# Altium PCB SAMPLE.PcbDoc
Units mil, origin at the board's own origin, x right, y up, seen from the top; angles counter-clockwise.
Board outline 3287.17 x 3789.32 mil, 2 copper layers (Top Layer, Bottom Layer); 11 components, 9 nets, 30 pads, 0 vias.
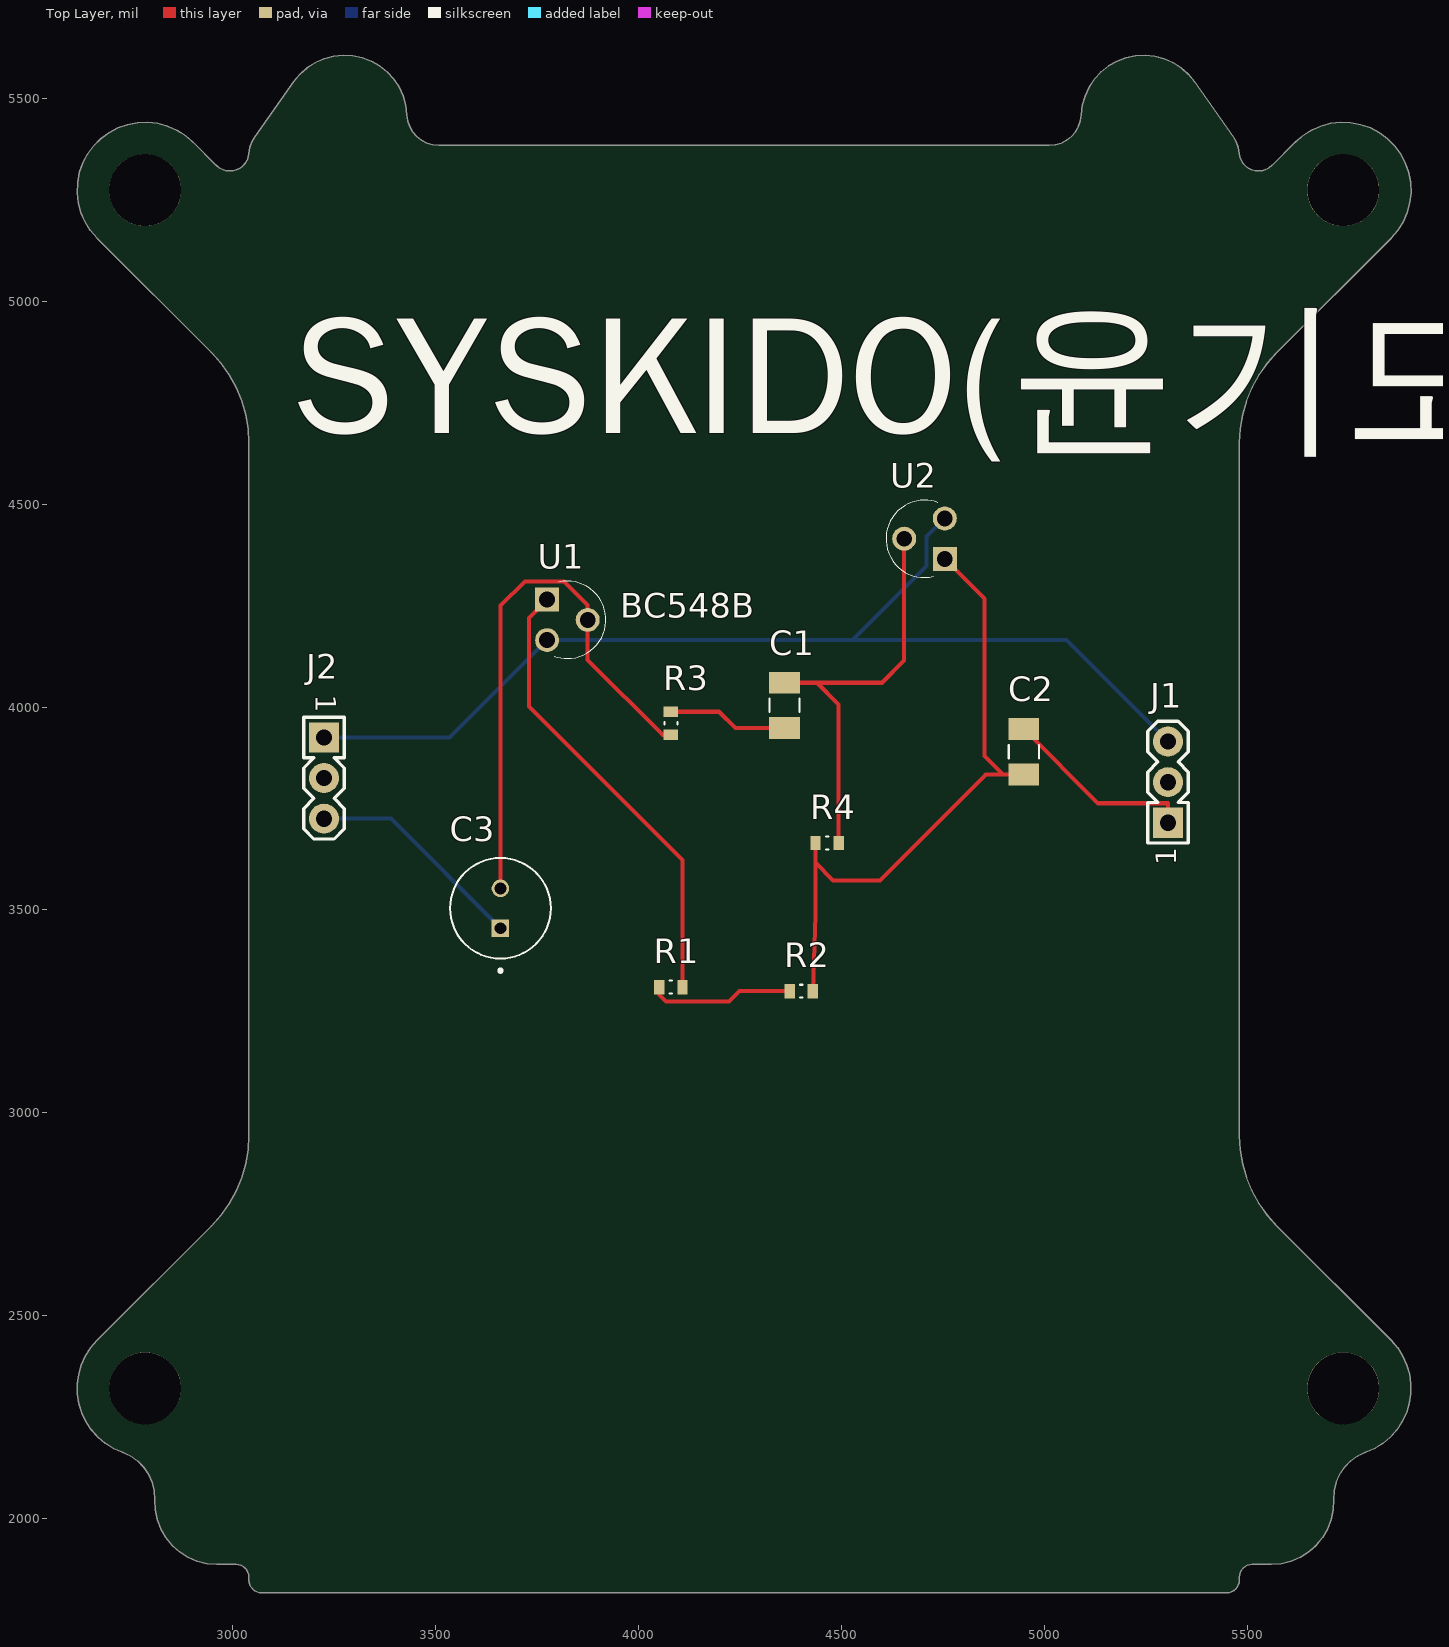
[diagram p0: Top Layer view]
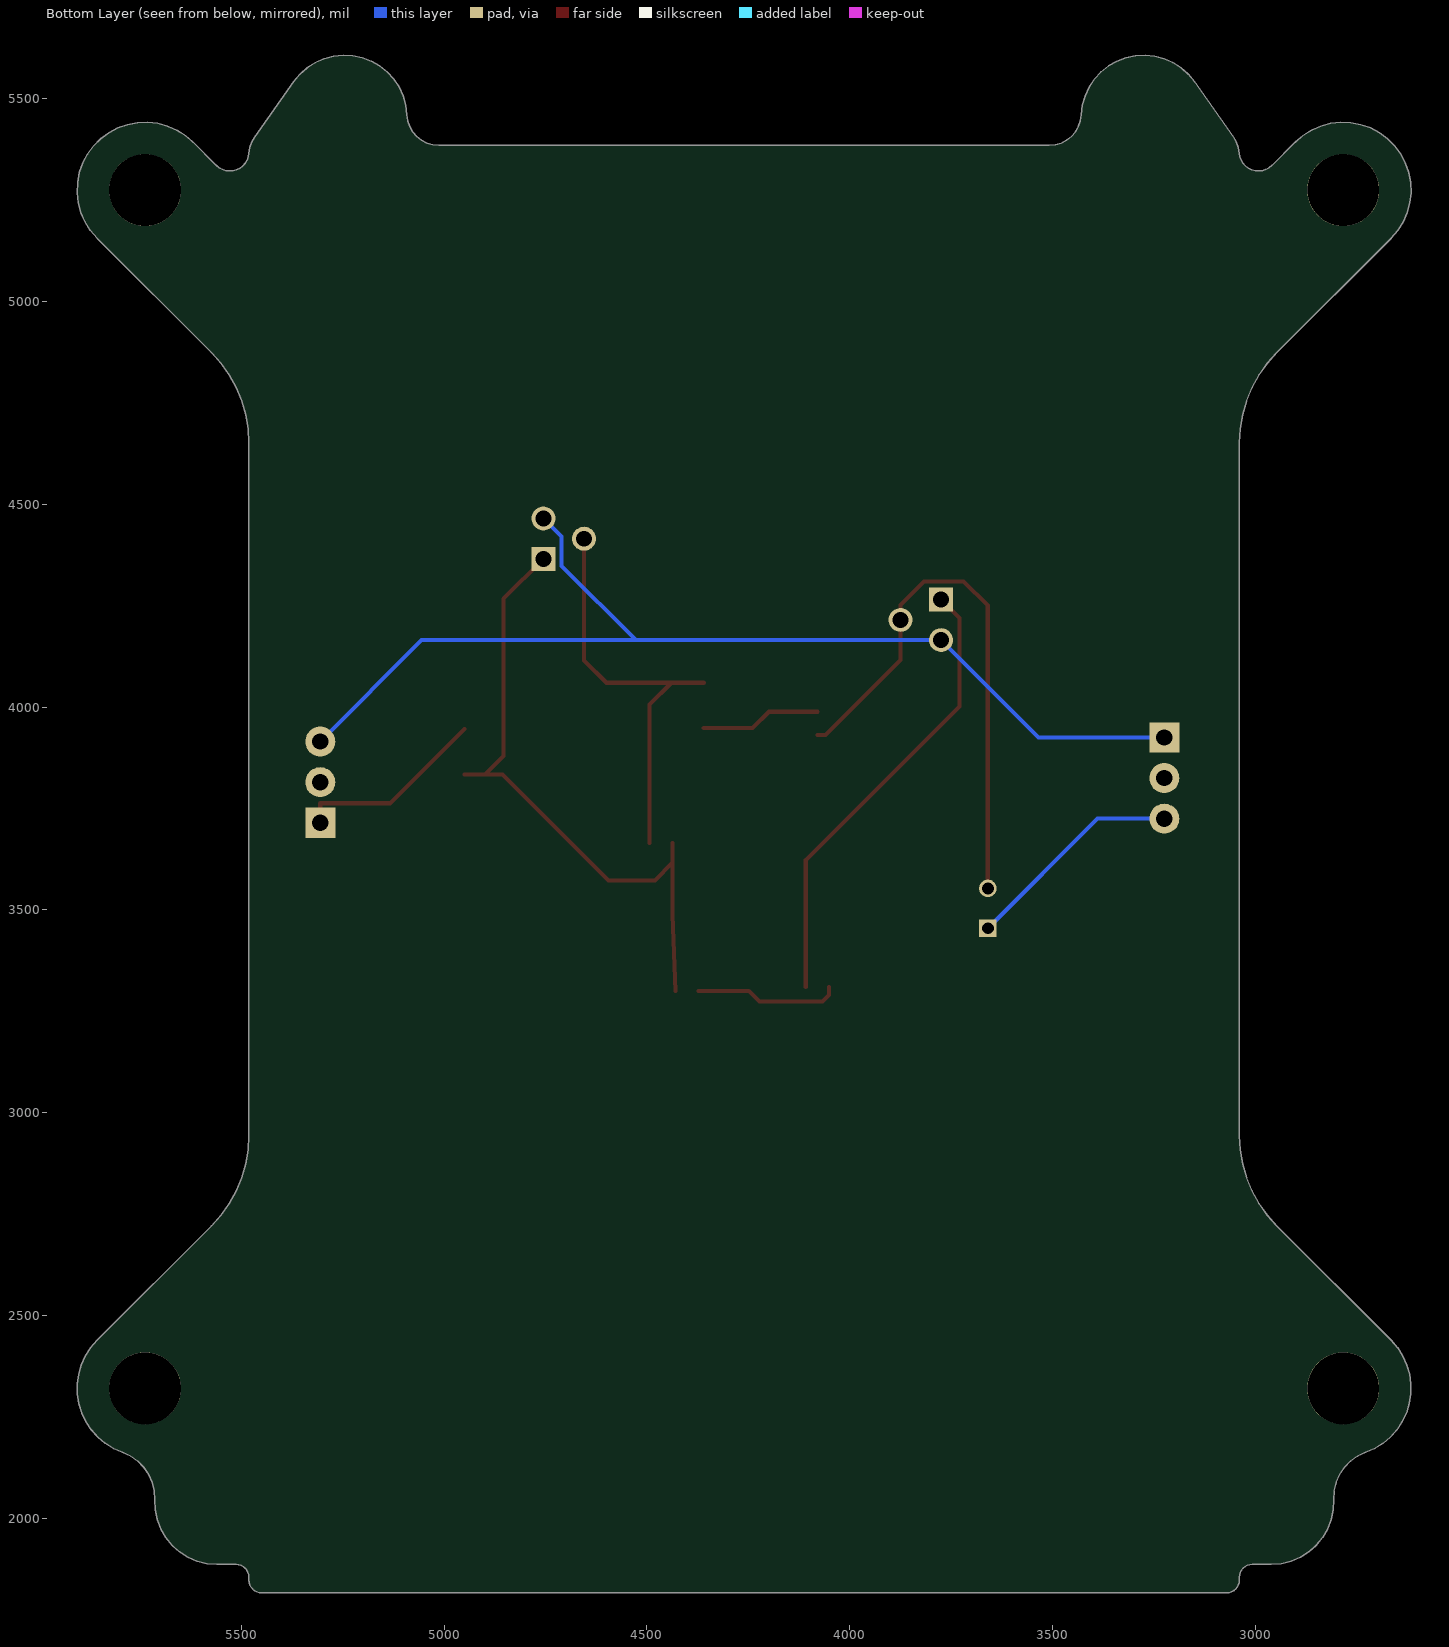
[diagram p1: Bottom Layer view, seen from below]

## Layer stack, top to bottom
Top Solder: solder mask 0.4, Solder Resist, Dk 3.5
Top Layer: signal copper 1.4
Dielectric 1: dielectric 12.6, FR-4, Dk 4.8
Bottom Layer: signal copper 1.4
Bottom Solder: solder mask 0.4, Solder Resist, Dk 3.5

## Board outline
5561.26,5335 5618.54,5392.27 5637.49,5408.58 5658.67,5421.89 5681.59,5431.89 5705.74,5438.36 5730.59,5441.16 5755.58,5440.23 5780.16,5435.58 5803.76,5427.32 5825.87,5415.63 5845.99,5400.78 5863.68,5383.1 5878.53,5362.98 5890.21,5340.87 5898.47,5317.26 5903.12,5292.69 5904.06,5267.7 5901.26,5242.85 5894.78,5218.69 5884.78,5195.77 5871.48,5174.6 5855.17,5155.64 5573.2,4873.67 5549.66,4847.33 5529.22,4818.53 5512.14,4787.62 5498.62,4754.99 5488.84,4721.05 5482.93,4686.22 5480.94,4650.96 5480.94,2944.2 5482.93,2908.93 5488.84,2874.11 5498.62,2840.17 5512.14,2807.54 5529.22,2776.63 5549.66,2747.82 5573.2,2721.49 5855.17,2439.52 5870.95,2421.28 5883.94,2400.96 5893.88,2378.99 5900.55,2355.81 5903.83,2331.92 5903.64,2307.8 5899.98,2283.97 5892.93,2260.9 5882.64,2239.09 5869.32,2218.99 5853.25,2201 5834.76,2185.52 5814.24,2172.85 5792.11,2163.27 5772.57,2154.36 5754.97,2142.07 5739.88,2126.79 5727.81,2109.03 5719.15,2089.38 5714.2,2068.49 5713.1,2047.05 5712.11,2022.36 5707.16,1998.15 5698.4,1975.05 5686.04,1953.65 5670.41,1934.51 5651.92,1918.13 5631.03,1904.93 5608.3,1895.24 5584.31,1889.33 5559.69,1887.34 5512.44,1887.34 5506.3,1886.74 5500.39,1884.95 5494.94,1882.03 5490.17,1878.12 5486.25,1873.34 5483.34,1867.9 5481.55,1861.99 5480.94,1855.85 5480.94,1848.76 5480.34,1842.62 5478.55,1836.71 5475.64,1831.26 5471.72,1826.49 5466.95,1822.57 5461.5,1819.66 5455.59,1817.87 5449.45,1817.26 3071.5,1817.26 3065.35,1817.87 3059.44,1819.66 3054,1822.57 3049.23,1826.49 3045.31,1831.26 3042.4,1836.71 3040.61,1842.62 3040,1848.76 3040,1855.85 3039.39,1861.99 3037.6,1867.9 3034.69,1873.34 3030.78,1878.12 3026,1882.03 3020.56,1884.95 3014.65,1886.74 3008.5,1887.34 2961.26,1887.34 2936.63,1889.33 2912.64,1895.24 2889.91,1904.93 2869.03,1918.13 2850.53,1934.51 2834.9,1953.65 2822.55,1975.05 2813.78,1998.15 2808.84,2022.36 2807.84,2047.05 2806.75,2068.49 2801.79,2089.38 2793.13,2109.03 2781.06,2126.79 2765.98,2142.07 2748.37,2154.36 2728.83,2163.27 2706.7,2172.85 2686.18,2185.52 2667.69,2201 2651.62,2218.99 2638.3,2239.09 2628.01,2260.9 2620.97,2283.97 2617.31,2307.8 2617.12,2331.92 2620.39,2355.81 2627.07,2378.99 2637.01,2400.96 2650,2421.28 2665.78,2439.52 2947.75,2721.49 2971.29,2747.82 2991.72,2776.63 3008.81,2807.54 3022.33,2840.17 3032.1,2874.11 3038.02,2908.93 3040,2944.2 3040,4650.96 3038.02,4686.22 3032.1,4721.05 3022.33,4754.99 3008.81,4787.62 2991.72,4818.53 2971.29,4847.33 2947.75,4873.67 2665.78,5155.64 2649.47,5174.6 2636.16,5195.77 2626.16,5218.69 2619.69,5242.85 2616.89,5267.7 2617.82,5292.69 2622.47,5317.26 2630.73,5340.87 2642.42,5362.98 2657.27,5383.1 2674.95,5400.78 2695.07,5415.63 2717.18,5427.32 2740.79,5435.58 2765.36,5440.23 2790.35,5441.16 2815.2,5438.36 2839.36,5431.89 2862.28,5421.89 2883.45,5408.58 2902.41,5392.27 2959.68,5335 2966.6,5329.28 2974.48,5324.98 2983.03,5322.25 2991.94,5321.18 3000.9,5321.81 3009.57,5324.13 3017.65,5328.05 3024.84,5333.42 3030.88,5340.06 3035.56,5347.72 3038.71,5356.13 3040.21,5364.98 3042.5,5378.96 3047.27,5392.3 3054.34,5404.58 3150.65,5541.45 3165.83,5559.82 3183.68,5575.61 3203.75,5588.46 3225.58,5598.04 3248.62,5604.13 3272.32,5606.58 3296.13,5605.34 3319.45,5600.42 3341.73,5591.96 3362.43,5580.15 3381.05,5565.28 3397.15,5547.7 3410.34,5527.85 3420.29,5506.19 3426.77,5483.26 3429.63,5459.6 3431.69,5444.72 3436.54,5430.5 3444.01,5417.47 3453.81,5406.09 3465.6,5396.78 3478.94,5389.87 3493.34,5385.63 3508.3,5384.19 5012.65,5384.19 5027.6,5385.63 5042.01,5389.87 5055.35,5396.78 5067.14,5406.09 5076.94,5417.47 5084.4,5430.5 5089.25,5444.72 5091.32,5459.6 5094.17,5483.26 5100.66,5506.19 5110.61,5527.85 5123.79,5547.7 5139.89,5565.28 5158.52,5580.15 5179.22,5591.96 5201.5,5600.42 5224.82,5605.34 5248.62,5606.58 5272.33,5604.13 5295.37,5598.04 5317.19,5588.46 5337.27,5575.61 5355.11,5559.82 5370.3,5541.45 5466.6,5404.58 5473.68,5392.3 5478.44,5378.96 5480.74,5364.98 5482.24,5356.13 5485.38,5347.72 5490.06,5340.06 5496.11,5333.42 5503.3,5328.05 5511.37,5324.13 5520.05,5321.81 5529,5321.18 5537.91,5322.25 5546.46,5324.98 5554.34,5329.28

## Design rules (kind name [scope] priority, off if disabled: settings)
Clearance [All] p1: gap=10 ignorepadtopadclearanceinfootprint=FALSE
PolygonConnect [All] p1: connectstyle=Relief reliefconductorwidth=10 reliefentries=4 polygonreliefangle="90 Angle" airgapwidth=10
RoutingVias [All] p1: holewidth=28 width=50 viastyle="Through Hole" minholewidth=28 minwidth=50 maxholewidth=28 maxwidth=50
SolderMaskExpansion [All] p1: expansion=4 istentingtop=FALSE
Width [All] p1: maxlimit=10 minlimit=10 preferedwidth=10
30 further rules are at their usual default settings.

## Classes and differential pairs
component class SAMPLE: " " C1 C2 J2 R1 R2 R3 U2

## Components (designator, comment, footprint, x,y, rotation, side; value= is the part's Value field where it differs from the comment)
C1 "GRM31CR60J227ME11L" CAPC3216X190N 4360,4004.06 r90 top
C2 "GRM31CR60J227ME11L" CAPC3216X190N 4950,3890 r90 top
C3 "ECA1HM470" CAPPRD250W50D630H1120 3660,3504.21 r90 top
J1 "22-28-4033" 1X03-PIN 5305,3715 r90 top
J2 "22-28-4033" 1X03-PIN 3225,3925 r270 top
R1 "ERA3AEB301V" RES_ERA3AEB301V 4080,3310 r180 top
R2 "ERA3AEB301V" RES_ERA3AEB301V 4401.46,3300 r180 top
R3 "ERA3AEB301V" RES_ERA3AEB301V 4080,3960 r90 top
R4 "ERA3AEB301V" RES_ERA3AEB301V 4465,3665 r180 top
U1 "BC548B" TO127P254X732-3 3875,4165 r270 top
U2 "BC548B" TO127P254X732-3 4655,4465 r90 top

## Footprints (in the part's own frame and the unit in brackets; to place one, negate y for a bottom-side part, rotate by r counter-clockwise, add the part's x,y. Pads: shape width x height; smd on the part's side, far side on the other; paste and mask are expansions set on the pad)
1X03-PIN [mil]
  rect 74x74 / inner round 74 / far side rect 74x74 hole 40: 1(0,0)
  round 74 hole 40: 2(100,0) 3(200,0)
  silkscreen extent -50,-50 250,50
CAPC3216X190N [mm]
  rect 1.37x1.91 smd: 1(-1.421,0) 2(1.421,0)
  silkscreen extent -0.42,-0.95 0.42,0.95, body extent -1.6,-0.8 1.6,0.8, height 1.9
CAPPRD250W50D630H1120 [mm]
  round 1.1 hole 0.75: N(1.25,0)
  rect 1.1x1.1 hole 0.75: P(-1.25,0)
  silkscreen extent -4,-3.15 3.15,3.15, body extent -3.15,-3.15 3.15,3.15, height 11.2
RES_ERA3AEB301V [mm]
  rect 0.65x0.9 smd: 1(-0.725,0) 2(0.725,0)
  silkscreen extent -0.08,-0.4 0.08,0.4
TO127P254X732-3 [mil]
  rect 59x59 hole 39: 1(-100,-100)
  round 59 hole 39: 2(-50,0) 3(0,-100)
  silkscreen extent -146,-83 45,45

## Part data
C1 C2: "SMD Multilayer Ceramic Capacitor, GRM Series, 220 F, 20%, X5R, 6.3 V, 1206 [3216 Metric]", Package="3216 Murata", Check_prices=https://www.snapeda.com/parts/GRM31CR60J227ME11L/Murata%20Electronics%20North%20America/view-part/1756709/?ref=eda, Digi-Key_Part_Number=490-13970-1-ND, MF="Murata Electronics", MP=GRM31CR60J227ME11L, Purchase-URL=https://pricing.snapeda.com/search/part/GRM31CR60J227ME11L/?ref=eda, SnapEDA_Link=https://www.snapeda.com/parts/GRM31CR60J227ME11L/Murata%20Electronics%20North%20America/view-part/1756709/?ref=snap
C3: "47ÂµF 50V Aluminum Electrolytic Capacitors Radial, Can 2000 Hrs @ 85Â°C", Package="RADIAL-2 Panasonic", Availability="In Stock", Check_prices=https://www.snapeda.com/parts/ECA1HM470/Panasonic%20Electronic%20Components/view-part/562975/?ref=eda, MF="Panasonic Electronic", MP=ECA1HM470, Price=None, Purchase-URL=https://pricing.snapeda.com/search/part/ECA1HM470/?ref=eda, SnapEDA_Link=https://www.snapeda.com/parts/ECA1HM470/Panasonic%20Electronic%20Components/view-part/562975/?ref=snap
J1 J2: "Connector Header Through Hole 3 position 0.100 (2.54mm)", Package=None, Availability="In Stock", Check_prices=https://www.snapeda.com/parts/22284033/Molex/view-part/?ref=eda, MF=Molex, MP=22284033, Price=None, SnapEDA_Link=https://www.snapeda.com/parts/22284033/Molex/view-part/?ref=snap
R1 R2 R3 R4: Package=None, Availability=Unavailable, MP=ERA3AEB301V, Price=None
U1 U2: "Transistor bipolar _BJT_ NPN 30V 100mA 300MHz 625mW Agujero pasante TO-92-3", Package="TO-92 Motorola", Availability=Unavailable, MF="ON Semiconductor", MP=BC548B, Price=None, SnapEDA_Link=https://www.snapeda.com/parts/BC548B/ON%20Semiconductor/view-part/697038/?ref=snap

## Free pads (board coordinates)
  round 177.17 hole 177.17: 1(2784.09,2321.2) 1(2784.09,5273.96) 1(5736.85,2321.2) 1(5736.85,5273.96)

## Nets (pads, with @x,y where several pads share a name; then routed paths per layer and width w, separated by ;. In a path a pad name is that pad's centre, name@x,y a point inside that pad or via, vN(x,y) a via of type N, cw(c..) or ccw(c..) an arc to the next point about the centre after c; other vN are vias at no path point)
+4.5: R1.2 R2.2 | length 358.9
  Top Layer w10: R1.2 4051.46,3290 4067.46,3274 4223,3274 4249,3300 R2.2
GND: J1.3 J2.1 U1.3 U2.3 | length 2677.4
  Bottom Layer w10: J2.1 3535,3925 U1.3 4527,4165 ; U2.3 4710,4420 4710,4348 4527,4165 ; J1.3 5055,4165 4527,4165
NetC1_1: C1.1 R3.2 | length 296.7
  Top Layer w10: R3.2 4199,3988.54 4239.43,3948.11 C1.1
NetC1_2: C1.2 R4.1 U2.2 | length 1035
  Top Layer w10: C1.2 4440,4060 ; R4.1 4493.54,4006.46 4440,4060 ; U2.2 4655,4115 4600,4060 4440,4060
NetC2_1: C2.1 R2.1 R4.2 U2.1 | length 1595.4
  Top Layer w10: R2.1 4436.46,3488.46 4436.46,3616.54 ; R4.2 4436.46,3616.54 ; U2.1 4852.94,4267.06 4852.94,3880 4898.89,3834.06 ; C2.1 4898.89,3834.06 ; 4436.46,3616.54 4480,3573 4594.94,3573 4856,3834.06 4898.89,3834.06
NetC2_2: C2.2 J1.1 | length 478.8
  Top Layer w10: C2.2 5132.94,3763 5305,3763 J1.1
NetC3_N: C3.N R3.1 U1.2 | length 1377.6
  Top Layer w10: C3.N 3660,4250 3720,4310 3817,4310 3875,4252 U1.2 3875,4116.46 4060,3931.46 R3.1
NetC3_P: C3.P J2.3 | length 546.8
  Bottom Layer w10: J2.3 3390,3725 C3.P
NetR1_1: R1.1 U1.1 | length 1130.4
  Top Layer w10: U1.1 3730,4220 3730,4001.54 4108.54,3623 R1.1
pads on no net: J1.2 J2.2

## Polygon pours and split planes (outlines as drawn)
GND on Mechanical 1 "+4.5_L02_P000" (solid, pour order 0): 259 vertices, not listed, extent 2616.89,1817.26 5904.06,5606.58

## Silkscreen, mask and mechanical layers (free items; w line width, h text height)
Top Overlay:
  text "SYSKIDO(윤기도)" at 3145,4675 h300

## Text inside footprints (layer, text, board x,y; h text height)
J1: Top Overlay "1" at 5325,3610 h50 r90
J2: Top Overlay "1" at 3205,4030 h50 r270